# EAGLE board fishnet-0.1 (EAGLE 6.2)
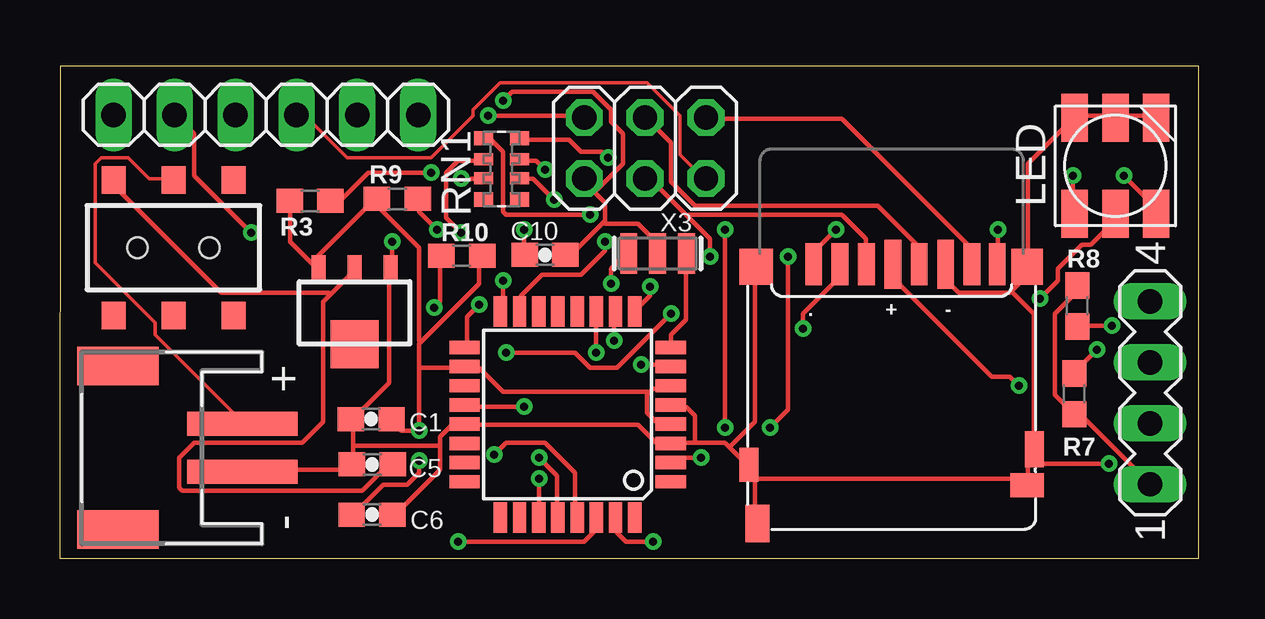
[diagram p0: board, top side]
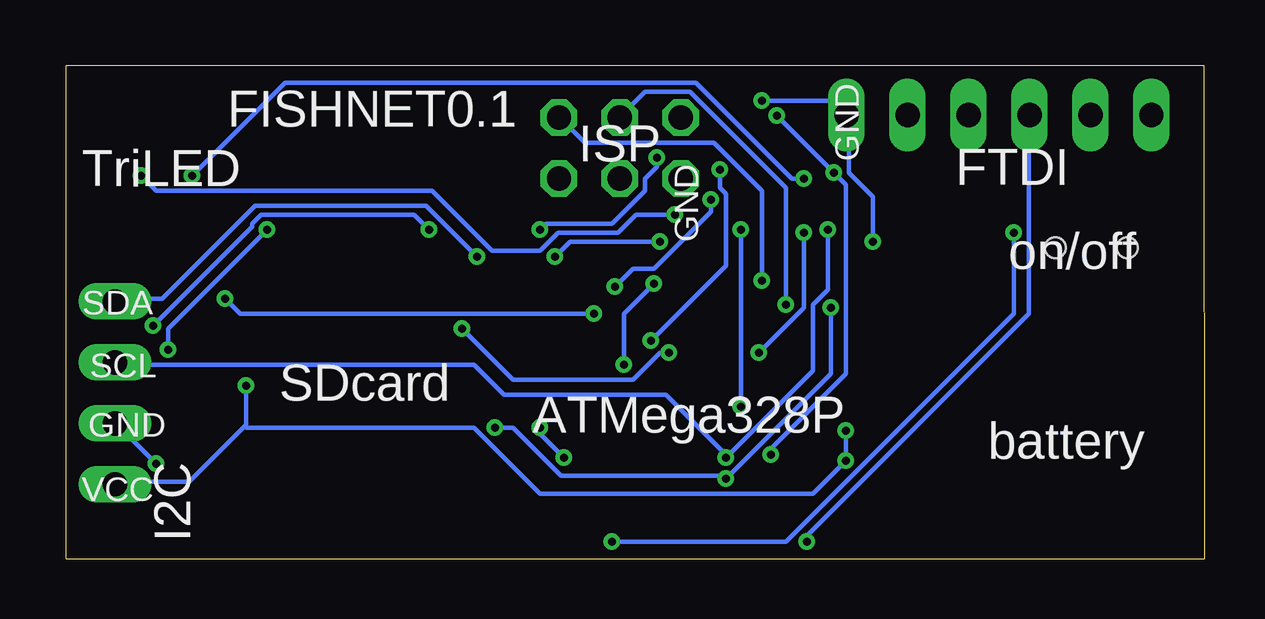
[diagram p1: board, bottom side, seen from below]

Size 47.48 x 20.55 mm. Coordinates in mm from the lower left corner, seen from the top.
Outline: 0,0 0.03,20.55 47.46,20.55 47.48,0 0,0
Copper layers (1*16): Top 0.0356mm / dielectric 1.5011mm / Bottom 0.0356mm
Design rules: minimum track width 6mil, minimum drill 13mil, track to track 6mil, track to pad 6mil, pad to pad 6mil, via to via 6mil, smd to smd 6mil, copper to edge 15mil, drill to drill 6mil, minimum pad ring 7mil, minimum via ring 7mil, stop-mask expansion 3mil, vias tented up to drill 0mil, thermal gap 10mil
Net classes: 0 default: width 0.178 mm, clearance 0.178 mm

## Footprints (pad centres in the part's own frame; a part is rotated, then mirrored left to right if it is on the bottom)
0603-CAP = smd 1.1 x 1: 1 -0.85,0; 2 0.85,0
JST-PH-2-SMT-RA = smd 1 x 4.6: 1 1,-3.7; 2 -1,-3.7 | smd 1.6 x 3.4: NC1 -3.4,1.5; NC2 3.4,1.5
TQFP32-08 = smd 1.27 x 0.559: 1 -4.293,2.8; 2 -4.293,2; 3 -4.293,1.2; 4 -4.293,0.4; 5 -4.293,-0.4; 6 -4.293,-1.2; 7 -4.293,-2; 8 -4.293,-2.8; 17 4.293,-2.8; 18 4.293,-2; 19 4.293,-1.2; 20 4.293,-0.4; 21 4.293,0.4; 22 4.293,1.2; 23 4.293,2; 24 4.293,2.8 | smd 0.559 x 1.27: 9 -2.8,-4.293; 10 -2,-4.293; 11 -1.2,-4.293; 12 -0.4,-4.293; 13 0.4,-4.293; 14 1.2,-4.293; 15 2,-4.293; 16 2.8,-4.293; 25 2.8,4.293; 26 2,4.293; 27 1.2,4.293; 28 0.4,4.293; 29 -0.4,4.293; 30 -1.2,4.293; 31 -2,4.293; 32 -2.8,4.293
SOT89 = smd 0.58 x 1.2: 1 -1.5,-1.8; 2 0,-1.8; 3 1.5,-1.8 | smd 2 x 2: 4 0,1.3
2X03 = drill 1.016 octagon: 1 -2.54,-1.27; 2 -2.54,1.27; 3 0,-1.27; 4 0,1.27; 5 2.54,-1.27; 6 2.54,1.27
AYZ0202 = smd 1 x 1.15: 1 -2.5,2.825; 2 0,2.825; 3 2.5,2.825; 4 -2.5,-2.825; 5 0,-2.825; 6 2.5,-2.825 | hole 0.85: 1.5,0; -1.5,0
1X06 = drill 1.016 long: 1 -6.35,0; 2 -3.81,0; 3 -1.27,0; 4 1.27,0; 5 3.81,0; 6 6.35,0
RGBLED5050 = smd 2 x 1.1: 1 -2,1.7; 2 -2,0; 3 -2,-1.7; 4 2,-1.7; 5 2,0; 6 2,1.7
0603-NO = smd 1.1 x 1: 1 -0.85,0; 2 0.85,0
EXB38V = smd 0.6 x 0.8: 1 -1.275,-0.75; 4 1.275,-0.75; 5 1.275,0.75; 8 -1.275,0.75 | smd 0.5 x 0.8: 2 -0.4,-0.75; 3 0.4,-0.75; 6 0.4,0.75; 7 -0.4,0.75
MA04-1 = drill 1.016 long: 1 -3.81,0; 2 -1.27,0; 3 1.27,0; 4 3.81,0
DM3D = smd 0.7 x 1.75: CD/DAT3 8.15,0.45; CLK 4.85,0.45; CMD 7.05,0.45; DAT0 2.65,0.45; DAT1 1.6,0.45; DAT2 9.25,0.45 | smd 0.8 x 1.5: GND1 0.05,8.15 | smd 0.8 x 1.4: GND2 11.95,8.8 | smd 1.4 x 1.5: GND3 11.65,0.55 | smd 1.3 x 1.5: GND4 0.35,0.55 | smd 1 x 1.55: SW_A 11.6,11.25 | smd 1.4 x 1: SW_B 0.35,9.65 | smd 0.7 x 2.032: VDD 5.95,0.45; VSS 3.75,0.45
RESONATOR-SMD = smd 0.7 x 1.7: 1 -1.2,0; 2 0,0; 3 1.2,0

## Placement (x,y rotation side)
C1  0.1uF  [0603-CAP]  12.97,5.83 0 top
C5  10uF  [0603-CAP]  13.02,3.94 180 top
C6  10uF  [0603-CAP]  13.01,1.85 0 top
C10  0.1uF  [0603-CAP]  20.22,12.67 0 top
CN1  [JST-PH-2-SMT-RA]  3.91,4.63 90 top
IC1  ATMEGA328P  [TQFP32-08]  21.16,6.02 180 top
IC4  MCP1700-33  [SOT89]  12.27,10.25 180 top
ISP  [2X03]  24.39,17.12 180 top
J1  AYZ0202  [AYZ0202]  4.73,12.97 0 top
JP2  [1X06]  8.59,18.5 180 top
LED  RGBLED5050  [RGBLED5050]  43.99,16.38 90 top
R3  10K  [0603-NO]  10.43,14.92 180 top
R7  50K  [0603-NO]  42.28,6.88 90 top
R8  50K  [0603-NO]  42.41,10.54 90 top
R9  10K  [0603-NO]  14.06,15 180 top
R10  10K  [0603-NO]  16.75,12.63 0 top
RN1  [EXB38V]  18.4,16.26 90 top
SV1  [MA04-1]  45.44,6.92 90 top
U$1  MICROSD-HRS_DM3D  [DM3D]  40.67,12.73 180 top
X3  16 MHz  [RESONATOR-SMD]  24.91,12.73 0 top

## Library data of the parts
C1 C5 C6 C10 X3 = SparkFun
CN1 IC4 LED = adafruit
IC1 = atmel; MPN: ATMEGA8-16AU; OC_FARNELL: 9171371; OC_NEWARK: 73M8863
ISP JP2 = pinhead
J1 = SparkFunNew
R3 R7-R10 = microbuilder
RN1 = resistor-dil; OC_FARNELL: unknown; OC_NEWARK: unknown
SV1 = con-lstb; OC_FARNELL: unknown; OC_NEWARK: unknown
U$1 = hrs_DM3D-SF

## Nets
A0: IC1.23
A1: IC1.24
A2: IC1.25
A3: IC1.26
AREF: C10.1 IC1.20
D2: IC1.32
D3: IC1.1
D4: IC1.2 RN1.4
D5: IC1.9 RN1.2
D6: IC1.10 RN1.3
D7: IC1.11 U$1.CD/DAT3
D8: IC1.12
D9: IC1.13
D10: IC1.14
GND: C1.1 C5.2 C6.2 C10.2 CN1.2 IC1.3 IC1.5 IC1.21 IC4.1 ISP.6 JP2.1 LED.4 LED.5 LED.6 SV1.2 U$1.GND1 U$1.GND2 U$1.GND3 U$1.GND4 U$1.SW_A U$1.SW_B U$1.VSS X3.2
MISO: IC1.16 ISP.1 U$1.DAT0
MOSI: IC1.15 ISP.4 U$1.CMD
N$1: LED.3 RN1.5
N$2: IC1.7 X3.1
N$3: IC1.8 X3.3
N$8: LED.1 RN1.7
N$9: LED.2 RN1.6
N$16: R7.2 U$1.DAT1
N$18: R8.1 U$1.DAT2
RESET: IC1.29 ISP.5 R3.1
RST: JP2.6
RXD: IC1.30 JP2.4
SCK: IC1.17 ISP.3 U$1.CLK
SCL: IC1.28 R9.1 SV1.3
SDA: IC1.27 R10.1 SV1.4
TXD: IC1.31 JP2.5
VBAT [vcc]: CN1.1 J1.2
VBUS [vcc]: ISP.2 JP2.3
VCC: C1.2 C6.1 IC1.4 IC1.6 IC1.18 IC4.3 R3.2 R7.1 R8.2 R9.2 R10.2 SV1.1 U$1.VDD
VDD: C5.1 IC4.2 J1.1

## Tracks (layer width: path | path; a pad name or v marks a point on that pad's centre or on a via)
AREF  (via drill 0.33)
  Top 0.178: v19.35,13.72 19.35,12.72 C10.1 | v19.35,6.35 16.97,6.35 IC1.20
  Bottom 0.178: v19.35,6.35 v19.35,13.72
D4  (via drill 0.33)
  Top 0.178: v22.85,16.72 22.6,16.97 21.72,16.97 21.22,17.47 19.22,17.47 RN1.4 | v27.72,5.47 v27.72,13.72 | v26.72,4.22 25.6,4.22 25.47,4.1 IC1.2
  Bottom 0.178: v22.85,16.72 22.85,16.35 23.35,15.85 23.35,15.35 24.72,13.97 27.47,13.97 v27.72,13.72 | v27.72,5.47 27.72,5.22 v26.72,4.22
D5  (via drill 0.33)
  Top 0.178: v20.6,14.97 19.72,15.85 19.22,15.85 RN1.2 | v24.6,11.35 24.6,10.97 23.97,10.35 IC1.9
  Bottom 0.178: v20.6,14.97 20.6,14.47 22.97,12.1 23.85,12.1 v24.6,11.35
D6  (via drill 0.33)
  Top 0.178: v20.22,16.22 19.85,16.6 19.22,16.6 RN1.3 | v23.1,9.1 23.1,10.22 IC1.10
  Bottom 0.178: v20.22,16.22 20.22,15.47 19.97,15.22 19.97,12.22 v23.1,9.1
D7  (via drill 0.33)
  Top 0.178: v22.35,8.6 22.35,10.22 IC1.11 | v30.97,9.6 30.97,10.22 32.47,11.72 32.47,12.22 U$1.CD/DAT3
  Bottom 0.178: v22.35,8.6 22.72,8.6 23.85,7.47 28.85,7.47 v30.97,9.6
GND  (via drill 0.33)
  Top 0.178: 22.66,14.04 22.72,14.1 22.72,14.85 21.85,15.72 ISP.6 22.35,15.35 23.47,16.47 23.47,17.72 22.97,18.22 22.97,18.72 22.22,19.47 18.85,19.47 v18.47,19.1 | 22.66,14.04 21.35,12.72 21.1,12.72 C10.2 | X3.2 24.85,12.85 24.85,13.22 24.1,13.97 22.72,13.97 22.66,14.04 | 15.85,4.72 15.85,5.1 16.35,5.6 16.85,5.6 IC1.21 16.97,5.6 24.1,5.6 24.85,4.85 25.35,4.85 IC1.3 25.47,4.85 26.47,4.85 | 15.85,4.72 15.85,3.72 13.97,1.85 C6.2 | 12.22,4.72 12.22,5.72 C1.1 12.22,5.85 13.72,7.35 13.72,11.97 IC4.1 13.85,12.1 v13.85,13.22 | 12.22,4.72 12.22,3.97 C5.2 12.1,3.85 11.97,3.72 7.72,3.72 CN1.2 | 12.22,4.72 15.85,4.72 | 26.47,4.85 27.72,4.85 27.91,4.66 | 27.91,4.66 28.6,3.97 U$1.GND2 | 26.47,4.85 26.47,5.97 26.1,6.35 25.47,6.35 IC1.5 | 27.91,4.66 28.97,5.72 28.97,12.1 U$1.GND3 | 28.97,3.35 28.97,3.6 28.72,3.85 U$1.GND2 | 28.97,3.35 28.97,1.6 U$1.SW_A | LED.4 45.6,18.47 44.1,18.47 LED.5 43.97,18.47 42.35,18.47 LED.6 42.22,18.35 40.35,16.47 40.35,12.22 U$1.GND4 40.22,12.1 40.22,11.72 39.66,11.16 | 40.35,3.97 40.35,4.22 40.6,4.47 U$1.GND1 | 40.35,3.97 40.35,3.35 | 40.35,3.35 40.35,3.1 U$1.SW_B 40.35,3.35 | 39.66,11.16 39.6,11.1 37.47,11.1 36.97,11.6 36.97,12.22 U$1.VSS | 39.66,11.16 40.6,10.22 40.6,4.6 U$1.GND1 | 40.35,3.97 v43.72,3.97 | 40.35,3.97 U$1.GND1 | 40.35,3.35 28.97,3.35 | 28.97,3.35 U$1.GND2
  Bottom 0.178: v13.85,13.22 13.85,15.1 14.85,16.1 14.85,18.47 JP2.1 14.97,18.6 15.47,19.1 v18.47,19.1 | v43.72,3.97 45.35,5.6 SV1.2
MISO  (via drill 0.33)
  Top 0.178: v18.47,11.6 18.47,10.35 IC1.16 | U$1.DAT0 37.97,12.35 37.97,12.97 32.6,18.35 26.97,18.35 ISP.1
  Bottom 0.178: v18.47,11.6 18.47,15.35 20.47,17.35 25.85,17.35 26.85,18.35 ISP.1
MOSI  (via drill 0.33)
  Top 0.178: v22.72,13.22 22.72,12.85 21.72,11.85 20.1,11.85 19.22,10.97 19.22,10.35 IC1.15 | v27.1,12.6 27.1,13.35 26.16,14.29 | 26.16,14.29 24.72,15.72 24.47,15.72 ISP.4 | U$1.CMD 33.6,12.35 33.6,13.35 32.6,14.35 26.22,14.35 26.16,14.29
  Bottom 0.178: v22.72,13.22 26.47,13.22 v27.1,12.6
N$1  (via drill 0.33)
  Top 0.178: v22.1,14.35 18.6,14.35 18.47,14.47 18.47,16.97 17.97,17.47 17.72,17.47 RN1.5 | v44.35,15.97 45.6,14.72 45.6,14.47 LED.3
  Bottom 0.178: v22.1,14.35 23.72,14.35 24.47,13.6 26.97,13.6 27.72,12.85 29.72,12.85 32.22,15.35 43.72,15.35 v44.35,15.97
N$2  (via drill 0.33)
  Top 0.178: v24.22,8.1 25.35,8.1 IC1.7 | v22.97,11.47 22.97,12.1 23.6,12.72 X3.1
  Bottom 0.178: v24.22,8.1 24.22,10.22 v22.97,11.47
N$3
  Top 0.178: IC1.8 25.47,8.85 25.47,9.35 26.1,9.97 26.1,12.72 X3.3
N$8  (via drill 0.33)
  Top 0.178: v16.72,15.85 17.6,15.85 RN1.7 | v42.22,15.97 42.22,14.47 LED.1
  Bottom 0.178: v16.72,15.85 17.22,15.85 21.22,19.85 38.35,19.85 v42.22,15.97
N$9  (via drill 0.33)
  Top 0.178: v16.72,13.6 16.1,14.22 16.1,16.1 16.6,16.6 17.6,16.6 RN1.6 | v18.6,8.6 21.47,8.6 22.1,7.97 23.22,7.97 v25.47,10.22 | v40.85,10.85 41.6,11.6 41.6,12.1 42.6,13.1 42.97,13.1 43.97,14.1 43.97,14.35 LED.2
  Bottom 0.178: v16.72,13.6 16.72,10.47 v18.6,8.6 | v25.47,10.22 40.22,10.22 v40.85,10.85
N$16  (via drill 0.33)
  Top 0.178: v43.22,8.72 42.35,7.85 R7.2 | v39.1,13.72 39.1,12.35 U$1.DAT1
  Bottom 0.178: v43.22,8.72 43.22,9.6 v39.1,13.72
N$18  (via drill 0.33)
  Top 0.178: v43.85,9.72 42.47,9.72 R8.1 | v32.35,13.72 31.47,12.85 31.47,12.35 U$1.DAT2
  Bottom 0.178: v43.85,9.72 39.72,13.85 39.72,13.97 39.35,14.35 32.97,14.35 v32.35,13.72
RESET  (via drill 0.33)
  Top 0.178: v15.47,16.1 12.85,16.1 11.72,14.97 11.35,14.97 R3.1 | v17.85,18.47 21.72,18.47 ISP.5 | v18.1,4.35 18.6,4.85 20.22,4.85 21.47,3.6 21.47,1.85 IC1.29
  Bottom 0.178: v17.85,18.47 v15.47,16.1 14.97,15.6 14.97,7.72 18.1,4.6 v18.1,4.35
RXD  (via drill 0.33)
  Top 0.178: v16.6,0.72 21.85,0.72 22.35,1.22 IC1.30
  Bottom 0.178: v16.6,0.72 16.6,0.97 7.35,10.22 7.35,18.47 JP2.4
SCK  (via drill 0.33)
  Top 0.178: v17.47,10.6 16.97,10.1 16.97,8.85 IC1.17 | U$1.CLK 35.72,12.35 35.72,13.1 34.1,14.72 26.47,14.72 25.47,15.72 25.47,17.35 24.47,18.35 ISP.3
  Bottom 0.178: v17.47,10.6 17.47,15.47 21.47,19.47 23.35,19.47 24.35,18.47 ISP.3
SCL  (via drill 0.33)
  Top 0.178: v15.72,13.72 14.97,14.47 14.97,14.97 R9.1 | v19.97,4.22 20.72,3.47 20.72,1.85 IC1.28
  Bottom 0.178: v15.72,13.72 15.72,11.22 16.35,10.6 16.35,7.85 v19.97,4.22 19.97,4.35 22.47,6.85 29.22,6.85 30.47,8.1 45.35,8.1 SV1.3
SDA  (via drill 0.33)
  Top 0.178: v15.6,10.47 15.85,10.72 15.85,12.6 R10.1 | v19.97,3.35 19.97,1.85 IC1.27 | v30.35,12.6 30.35,6.22 v29.6,5.47
  Bottom 0.178: v15.6,10.47 15.6,7.72 v19.97,3.35 19.97,3.47 26.85,3.47 28.85,5.47 v29.6,5.47 | v30.35,12.6 32.47,14.72 39.6,14.72 43.47,10.85 45.35,10.85 SV1.4
TXD  (via drill 0.33)
  Top 0.178: v24.72,0.72 23.6,0.72 23.22,1.1 23.22,1.72 IC1.31 | v7.97,13.6 5.6,15.97 5.6,17.72 4.85,18.47 JP2.5
  Bottom 0.178: v24.72,0.72 17.47,0.72 7.97,10.22 v7.97,13.6
VBAT
  Top 0.152: J1.2 4.72,15.85 3.72,15.85 2.85,16.72 1.72,16.72 1.47,16.47 1.47,12.35 3.97,9.85 3.97,9.35 7.6,5.72 CN1.1
VBUS
  Top 0.152: JP2.3 9.97,18.47 10.22,18.47 11.97,16.72 15.47,16.72 17.22,18.47 17.22,18.72 18.35,19.85 24.47,19.85 25.85,18.47 25.85,16.85 26.85,15.85 ISP.2
VCC  (via drill 0.33)
  Top 0.178: SV1.1 45.35,3.22 42.6,5.97 42.35,5.97 R7.1 42.22,6.1 41.47,6.85 41.47,10.22 42.35,11.1 42.35,11.35 R8.2 | v39.97,7.22 39.6,7.6 38.85,7.6 34.72,11.72 34.72,12.22 U$1.VDD | 10.47,12.35 10.72,12.1 IC4.3 | 10.47,12.35 9.6,13.22 9.6,14.85 R3.2 | 10.47,12.35 13.1,14.97 R9.2 13.1,14.85 14.97,12.97 14.97,9.1 15.04,9.04 | 24.54,6.91 24.72,7.1 25.35,7.1 IC1.6 | 24.54,6.91 24.47,6.85 24.47,6.1 24.85,5.72 25.35,5.72 IC1.4 | v14.97,4.1 14.97,3.6 14.47,3.1 13.47,3.1 12.22,1.85 C6.1 | C1.2 13.85,5.72 14.22,5.35 v14.97,5.35 14.97,7.97 | 15.04,9.04 14.97,8.97 14.97,7.97 | 15.04,9.04 17.47,11.47 17.47,12.6 R10.2 | 14.97,7.97 16.85,7.97 IC1.18 16.97,7.97 17.47,7.97 18.47,6.97 24.47,6.97 24.54,6.91
  Bottom 0.178: v39.97,7.22 39.97,5.6 40.04,5.54 | 40.04,5.54 42.35,3.22 45.35,3.22 SV1.1 | v14.97,5.35 v14.97,4.1 16.35,2.72 27.72,2.72 30.47,5.47 39.97,5.47 40.04,5.54
VDD
  Top 0.178: 11.29,11.04 12.22,11.97 IC4.2 | 11.29,11.04 10.97,10.72 10.97,5.72 10.1,4.85 5.6,4.85 4.97,4.22 4.97,2.97 5.1,2.85 12.6,2.85 13.6,3.85 13.85,3.85 C5.1 | J1.1 2.35,15.72 2.35,15.47 6.72,11.1 11.22,11.1 11.29,11.04

## Text on the board
bPlace: FISHNET0.1 | ISP | FTDI | on/off | SDcard | ATMega328P | battery | I2C
bNames: GND | GND | TriLED | SDA | SCL | GND | VCC